# Altium PCB PCB1.PcbDoc
Units mil, origin at the board's own origin, x right, y up, seen from the top; angles counter-clockwise.
Board outline 2900 x 2500 mil, 2 copper layers (Top Layer, Bottom Layer); 16 components, 5 nets, 36 pads, 0 vias.
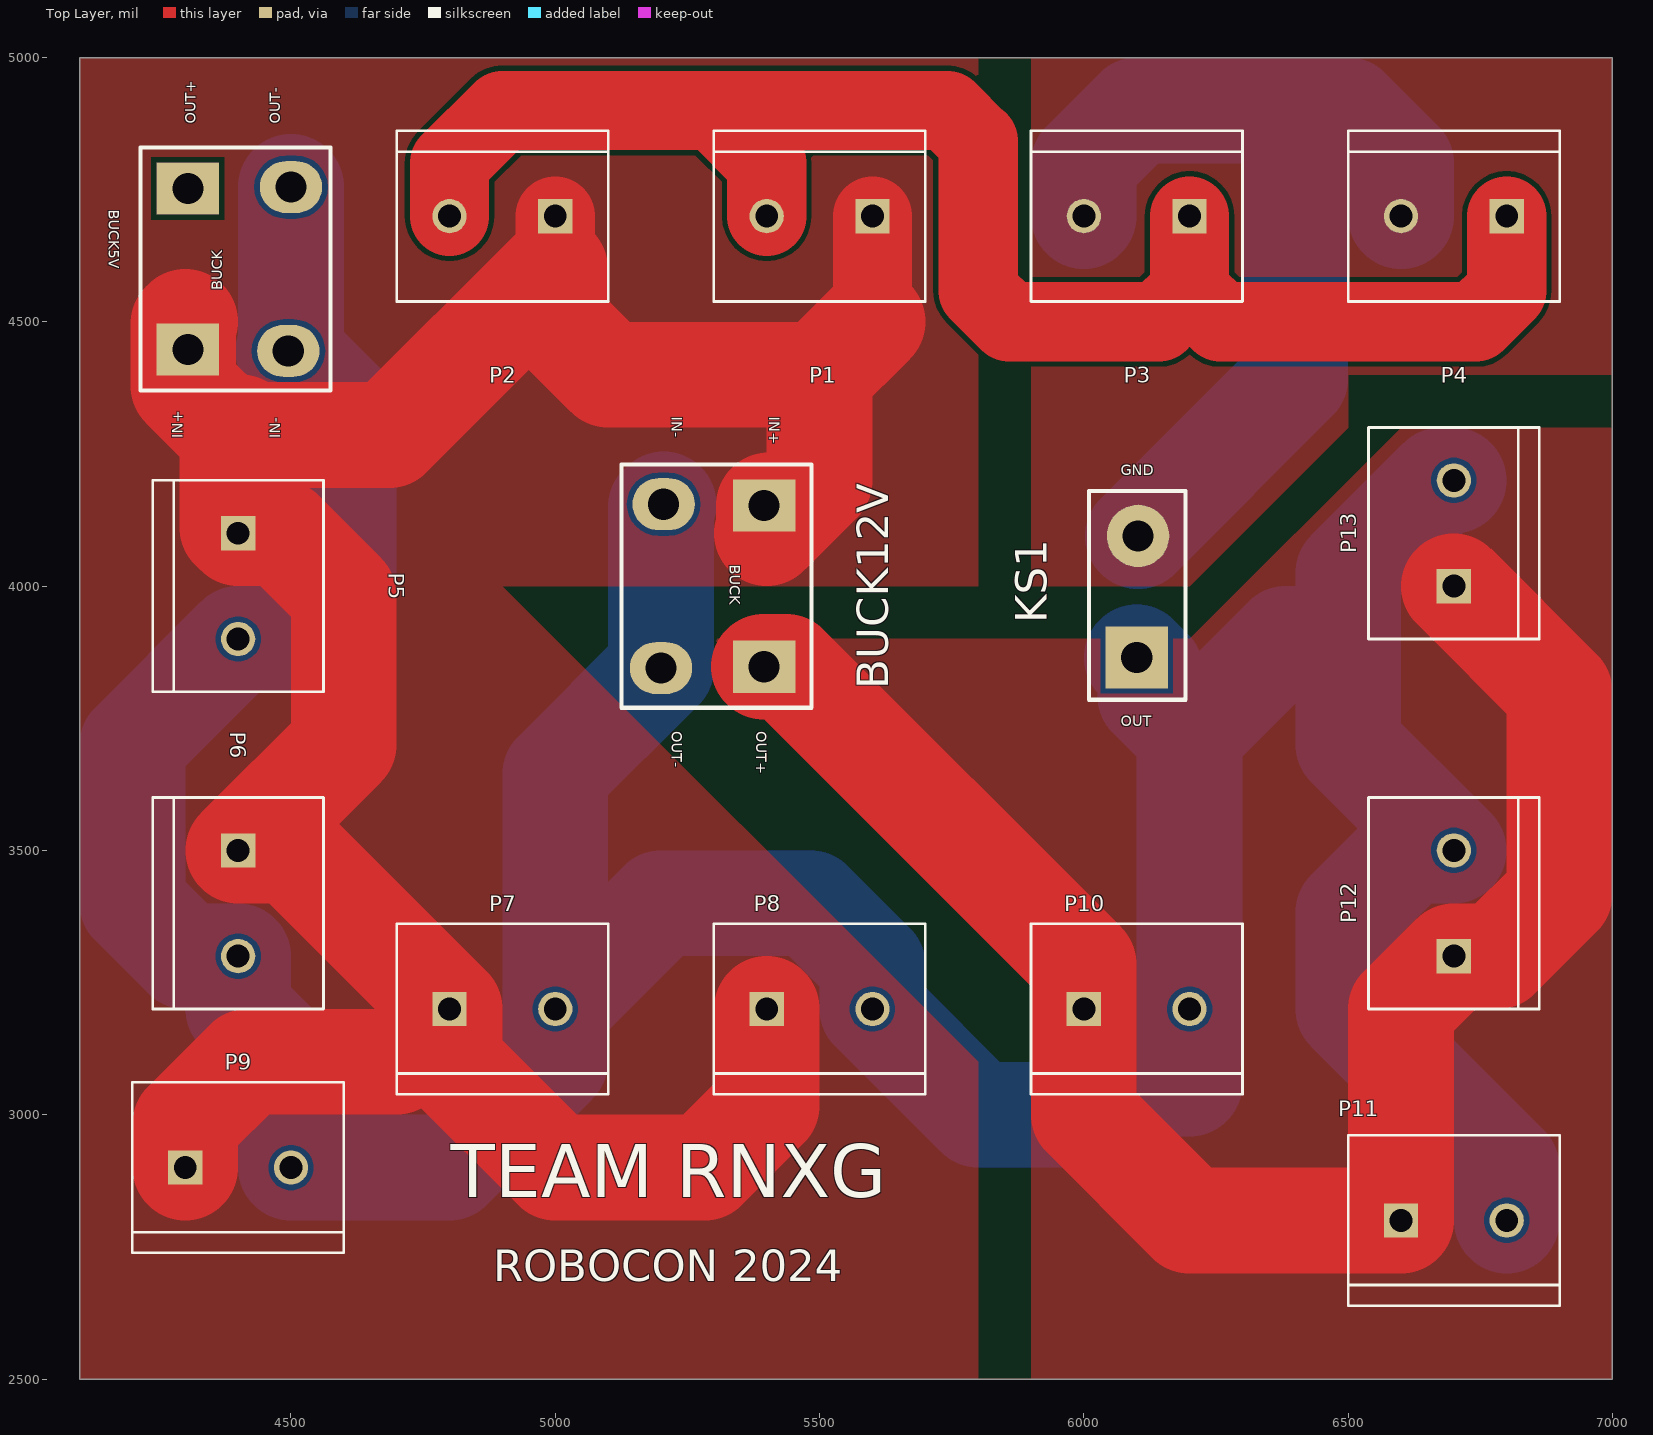
[diagram p0: Top Layer view]
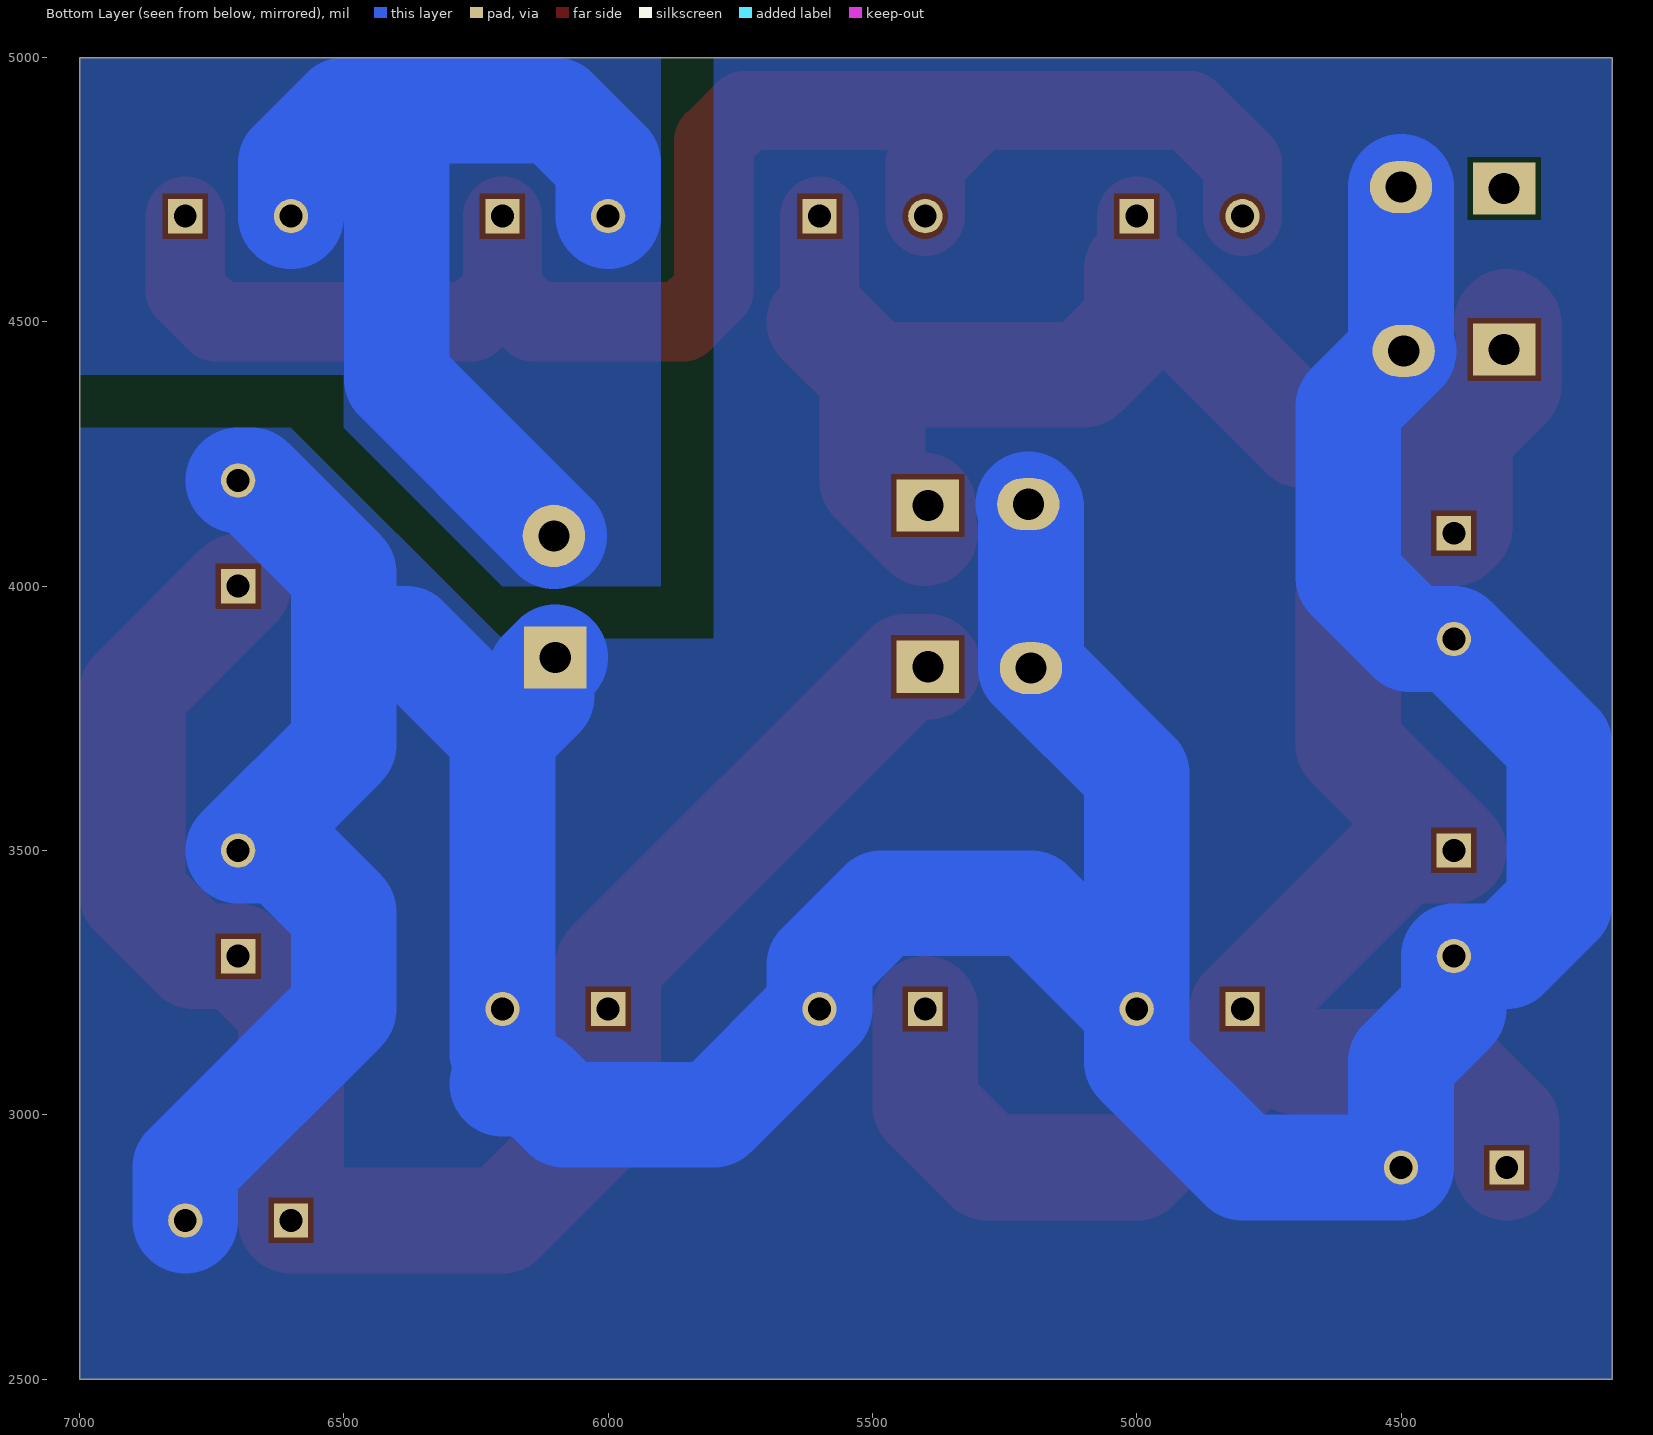
[diagram p1: Bottom Layer view, seen from below]
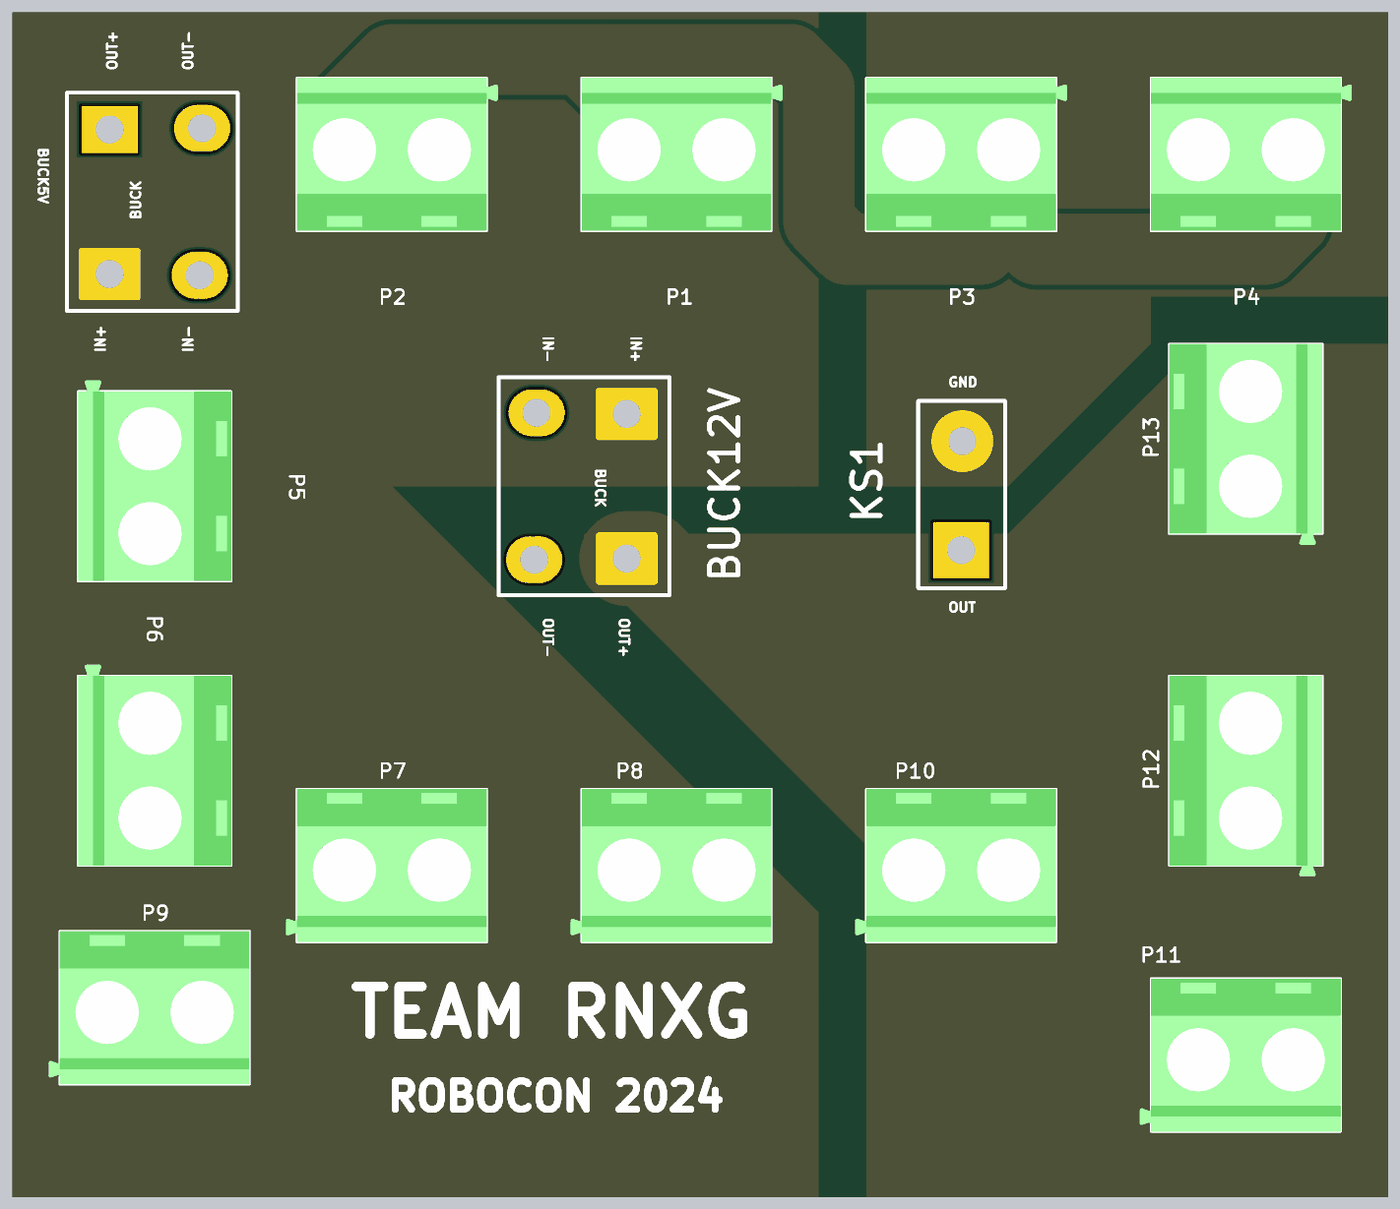
[diagram p2: 3D render of the assembled board from above, using the file's embedded part models]

## Layer stack, top to bottom
Top Solder: solder mask 0.4, Solder Resist, Dk 3.5
Top Layer: signal copper 1.4
Dielectric 1: dielectric 12.6, FR-4, Dk 4.8
Bottom Layer: signal copper 1.4
Bottom Solder: solder mask 0.4, Solder Resist, Dk 3.5

## Board outline
4100,5000 4100,2500 7000,2500 7000,5000

## Design rules (kind name [scope] priority, off if disabled: settings)
Clearance Clearance_3 [All] p1: gap=10 ignorepadtopadclearanceinfootprint=FALSE except(0: Arc-Hole Track-Hole SMDPad-Hole THPad-Hole Via-Hole Fill-Hole Poly-Hole Region-Hole Text-Hole Hole-Hole; 30: Arc-Arc Arc-Track Arc-Text Track-Track Track-Text Text-Text)
Clearance Clearance_1 [OnMid vs OnMid] p2: gap=10 ignorepadtopadclearanceinfootprint=FALSE sourcerule=38 cellrowname=All cellrowtype=0 cellcolname=All cellcoltype=0 innerlayers=TRUE
Clearance Clearance_2 [(ExistsOnLayer('Top Layer') Or ExistsOnLayer('Bottom Layer')) vs (ExistsOnLayer('Top Layer') Or ExistsOnLayer('Bottom Layer'))] p3: gap=10 ignorepadtopadclearanceinfootprint=FALSE sourcerule=38 cellrowname=All cellrowtype=0 cellcolname=All cellcoltype=0 outerlayers=TRUE
Clearance [All] p4: gap=10 ignorepadtopadclearanceinfootprint=FALSE ismatrix=TRUE
PlaneClearance [All] p1: clearance=100
PlaneConnect [All] p1: planeconnectstyle=Direct reliefexpansion=20 reliefentries=4 reliefconductorwidth=10 reliefairgap=10
PolygonConnect [All] p1: connectstyle=Direct reliefconductorwidth=10 reliefentries=4 polygonreliefangle="90 Angle" airgapwidth=10
RoutingVias [All] p1: holewidth=28 width=50 viastyle="Through Hole" minholewidth=28 minwidth=50 maxholewidth=28 maxwidth=50
SolderMaskExpansion [All] p1: expansion=6 istentingtop=FALSE
Width MaxMinWidth_1 [All] p1: maxlimit=300 minlimit=100 preferedwidth=200 minimp=50.000000 maximp=50.000000 favimp=50.000000
Width [All] p2: maxlimit=10 minlimit=10 preferedwidth=10
28 further rules are at their usual default settings.

## Components (designator, comment, footprint, x,y, rotation, side; value= is the part's Value field where it differs from the comment)
BUCK5V "BUCK" BUCK 4400,4600 r90 top
BUCK12V "BUCK" BUCK 5300,4000 r270 top
KS1 "KS" KS 6100,4000 r0 top
P1 "282837-2" TE_282837-2 5500,4700 r180 top
P2 "282837-2" TE_282837-2 4900,4700 r180 top
P3 "282837-2" TE_282837-2 6100,4700 r180 top
P4 "282837-2" TE_282837-2 6700,4700 r180 top
P5 "282837-2" TE_282837-2 4400,4000 r270 top
P6 "282837-2" TE_282837-2 4400,3400 r270 top
P7 "282837-2" TE_282837-2 4900,3200 r0 top
P8 "282837-2" TE_282837-2 5500,3200 r0 top
P9 "282837-2" TE_282837-2 4400,2900 r0 top
P10 "282837-2" TE_282837-2 6100,3200 r0 top
P11 "282837-2" TE_282837-2 6700,2800 r0 top
P12 "282837-2" TE_282837-2 6700,3400 r90 top
P13 "282837-2" TE_282837-2 6700,4100 r90 top

## Footprints (in the part's own frame and the unit in brackets; to place one, negate y for a bottom-side part, rotate by r counter-clockwise, add the part's x,y. Pads: shape width x height; smd on the part's side, far side on the other; paste and mask are expansions set on the pad)
BUCK [mm]
  rect 2.5x3 hole 1.5: 1(-3.873,2.413) 3(3.873,2.413)
  oval 2.5x3 hole 1.5: 2(-3.937,-2.413) 4(3.937,-2.54)
  silkscreen extent -5.84,-4.44 5.84,4.7
KS [mm]
  rect 3x3 hole 1.5: 1(0,-3.429)
  round 3 hole 1.5: 2(0.064,2.413)
  silkscreen extent -2.3,-5.46 2.35,4.57
TE_282837-2 [mm]
  rect 1.65x1.65 / inner round 1.65 / far side rect 1.65x1.65 hole 1.1: 1(-2.54,0)
  round 1.65 hole 1.1: 2(2.54,0)
  silkscreen extent -5.08,-4.1 5.08,4.1, body extent -5.68,-4.1 5.08,4.1, height 10

## Part data
P1 P2 P3 P4 P5 P6 P7 P8 P9 P10 P11 P12 P13: "Ð Ð°Ð·ÑŠÐµÐ¼Ð½Ñ‹Ðµ ÐºÐ»ÐµÐ¼Ð¼Ð½Ñ‹Ðµ ÐºÐ¾Ð»Ð¾Ð´ÐºÐ¸ Ð Ð¾Ð·ÐµÑ‚ÐºÐ° 2 Ð¿Ð¾Ð»Ð¾Ð¶ÐµÐ½Ð¸Ñ 5,08 Ð¼Ð¼ ÐŸÑ€Ð¸Ð¿Ð¾Ð¹ Ð¿Ñ€ÑÐ¼Ð¾Ð¹ Ñ‡ÐµÑ€ÐµÐ· Ð¾Ñ‚Ð²ÐµÑ€ÑÑ‚Ð¸Ðµ 13,5 Ð / ÐºÐ¾Ð½Ñ‚Ð°ÐºÑ‚", Package=None, Availability="In Stock", Check_prices=https://www.snapeda.com/parts/282837-2/TE+Connectivity+AMP+Connectors/view-part/?ref=eda, MF="TE Connectivity", MP=282837-2, Price=None, Purchase-URL=https://pricing.snapeda.com/search/part/282837-2/?ref=eda, SnapEDA_Link=https://www.snapeda.com/parts/282837-2/TE+Connectivity+AMP+Connectors/view-part/?ref=snap

## Nets (pads, with @x,y where several pads share a name; then routed paths per layer and width w, separated by ;. In a path a pad name is that pad's centre, name@x,y a point inside that pad or via, vN(x,y) a via of type N, cw(c..) or ccw(c..) an arc to the next point about the centre after c; other vN are vias at no path point)
12V: BUCK12V.3 P10.1 P11.1 P12.1 P13.1 | length 3260.9
  Top Layer w200: BUCK12V.3 5436.5,3847.5 6000,3284 6000,3000 6200,2800 P11.1 6600,3200 P12.1 6782.84,3300 6900,3417.16 6900,3800 P13.1
24V: BUCK5V.1 BUCK12V.1 P1.1 P2.1 P5.1 P6.1 P7.1 P8.1 P9.1 | length 5562.6
  Top Layer w150: 5000,4600 P2.1 ; 5600,4500 P1.1
  Top Layer w200: P9.1 4300,2982.84 4417.16,3100 4700,3100 ; 4300,4500 4295.94,4495.94 4295.94,4379.05 4389.21,4285.79 4389.21,4110.79 P5.1 4482.84,4100 4600,3982.84 4600,3700 P6.1 4500,3500 P7.1 4800,3100 5000,2900 5282.84,2900 5400,3017.16 P8.1 ; 4375,4300 4405,4300 4419.21,4285.79 4685.79,4285.79 5000,4600 5000,4500 5100,4400 5500,4400 ; 5400,4100 BUCK12V.1@5404.06,4104.06 ; BUCK12V.1@5404.06,4152.5 BUCK12V.1@5404.06,4104.06 ; 5600,4500 5500,4400 ; BUCK12V.1@5404.06,4104.06 5500,4200 5500,4400
GND: KS1.2 P3.2 P4.2 | length 1811.1
  Bottom Layer w200: P3.2 6000,4800 6100,4900 6400,4900 ; KS1.2 6400,4392.5 6400,4900 ; P4.2 6600,4800 6500,4900 6400,4900
NetP1_2: P1.2 P2.2 P3.1 P4.1 | length 3069.8
  Top Layer w150: P2.2 4800,4800 4900,4900 5300,4900 ; P1.2 5400,4800 5300,4900 ; P3.1 6200,4558.58 ; P4.1 6800,4558.58 6741.42,4500 6258.58,4500 6200,4558.58 ; 5300,4900 5741.42,4900 5800,4841.42 5800,4558.58 5858.58,4500 6141.42,4500 6200,4558.58
OUT: BUCK5V.2 BUCK5V.4 BUCK12V.2 BUCK12V.4 KS1.1 P5.2 P6.2 P7.2 P8.2 P9.2 P10.2 P11.2 P12.2 P13.2 | length 8542.3
  Bottom Layer w200: BUCK5V.4 4500,4450 BUCK5V.2 4600,4340 4600,4017.16 4482.84,3900 P5.2 4200,3700 4200,3400 4300,3300 P6.2 4400,3200 4500,3100 P9.2 4800,2900 5000,3100 P7.2 ; BUCK12V.2 5200,4150 BUCK12V.4 5000,3645 P7.2 ; KS1.1 6126,3839 6126,3792 6200,3718 ; 6200,3058.58 6141.42,3058.58 6082.84,3000 5800,3000 P8.2 5600,3282.84 5482.84,3400 5200,3400 P7.2 ; 6200,3117.16 P10.2 6200,3718 ; P13.2 6675,4200 6500,4025 6500,3900 ; P11.2 6800,2900 6500,3200 6500,3382.84 6617.16,3500 P12.2 6500,3700 6500,3900 ; 6200,3718 6382,3900 6500,3900
pads on no net: BUCK5V.3

## Polygon pours and split planes (outlines as drawn)
OUT on Bottom Layer "OUT" (solid, remove dead copper, pour order 1): 4100,5000 4100,2500 7000,2500 7000,4300 6600,4300 6200,3900 5800,3900 5800,5000
GND on Bottom Layer "GND" (solid, remove dead copper, pour order 0): 5900,5000 5900,4000 6200,4000 6500,4300 6500,4400 7000,4400 7000,5000
GND on Top Layer "GND" (solid, remove dead copper, pour order 4): 5900,5000 5900,4000 6200,4000 6500,4300 6500,4400 7000,4400 7000,5000
12V on Top Layer "OUT" (solid, remove dead copper, pour order 3): 5300,3900 6200,3900 6600,4300 7000,4300 7000,2500 5900,2500 5900,3300
24V on Top Layer "24V" (solid, remove dead copper, pour order 2): 4100,5000 5800,5000 5800,4000 4900,4000 5800,3100 5800,2500 4100,2500

## Silkscreen, mask and mechanical layers (free items; w line width, h text height)
Top Overlay:
  text "TEAM RNXG" at 4802.49,2843.56 h100
  text "ROBOCON 2024" at 4883,2685 h60
Mechanical 1:
  lines w7.87: 4100,2900 4500,2500 4100,2500 4100,5000
  lines w30: 4100,2500 7000,2500 7000,5000 4100,5000 4100,2500

## Text inside footprints (layer, text, board x,y; h text height)
BUCK5V: Top Overlay "OUT-" at 4480,4875 h20 r90; Top Overlay "OUT+" at 4320,4875 h20 r90; Top Overlay "IN-" at 4480,4280 h20 r90; Top Overlay "IN+" at 4295,4280 h20 r90
BUCK12V: Top Overlay "OUT-" at 5220,3725 h20 r270; Top Overlay "OUT+" at 5380,3725 h20 r270; Top Overlay "IN-" at 5220,4320 h20 r270; Top Overlay "IN+" at 5405,4320 h20 r270
KS1: Top Overlay "GND" at 6070,4210 h20; Top Overlay "OUT" at 6070,3735 h20